# Allegro board PROJECT1.brd
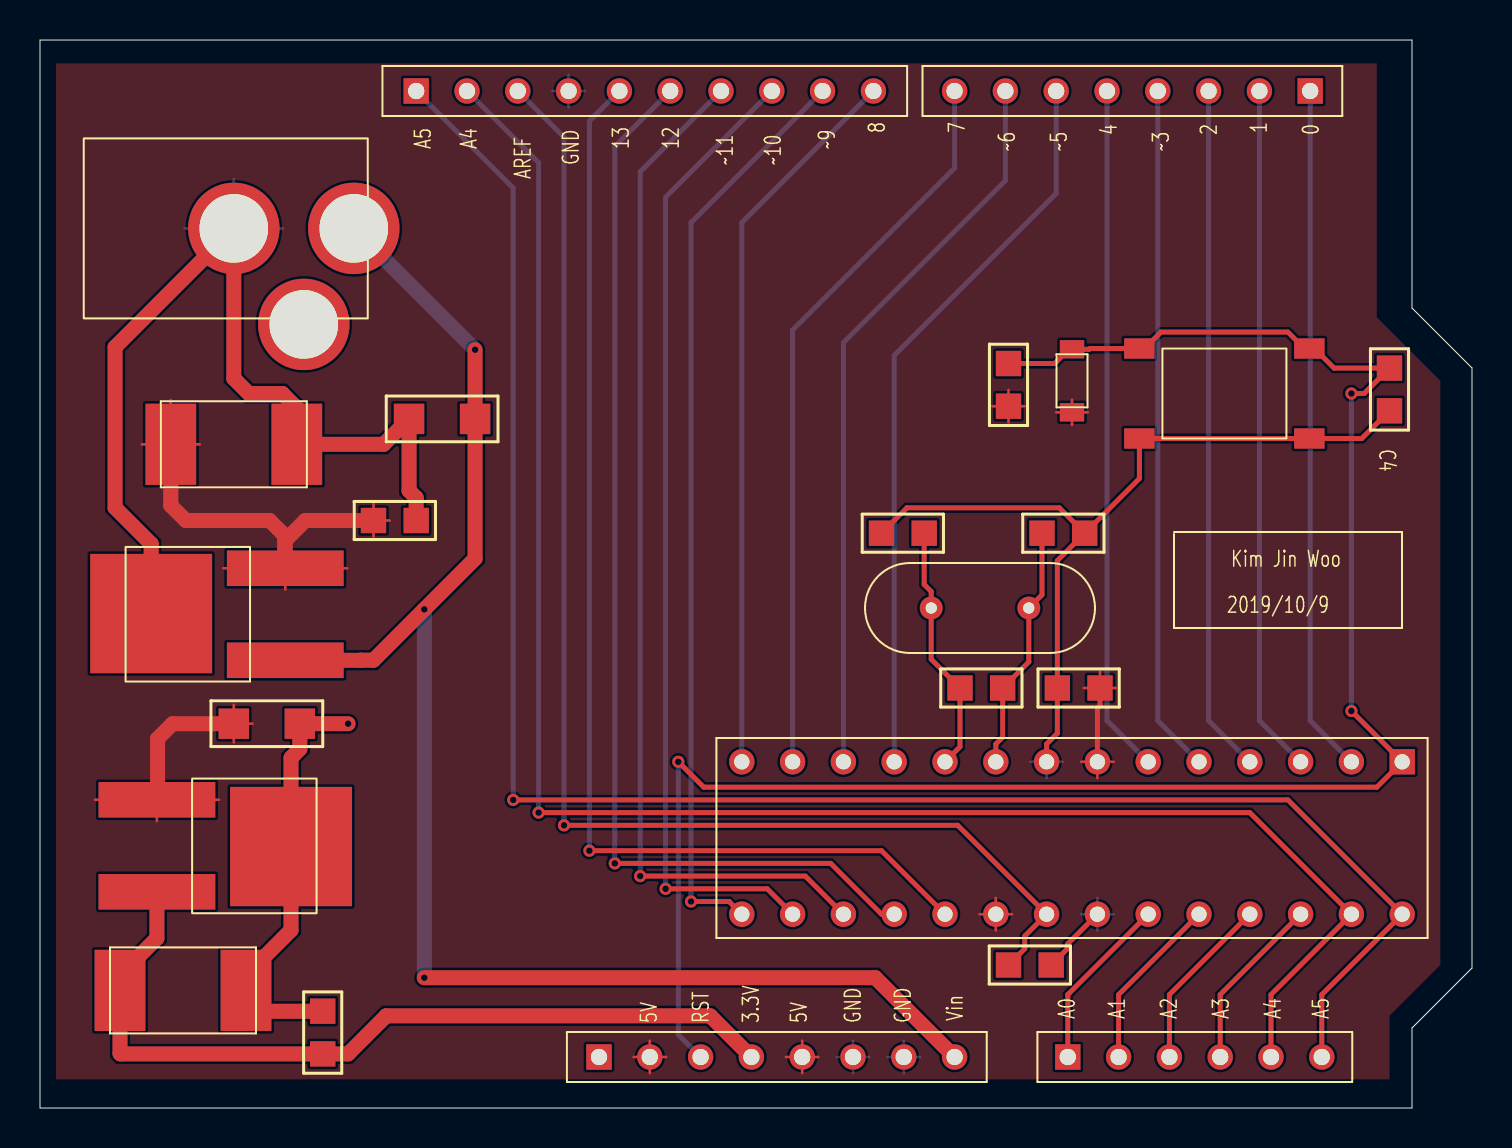
[diagram p0: board, top side]
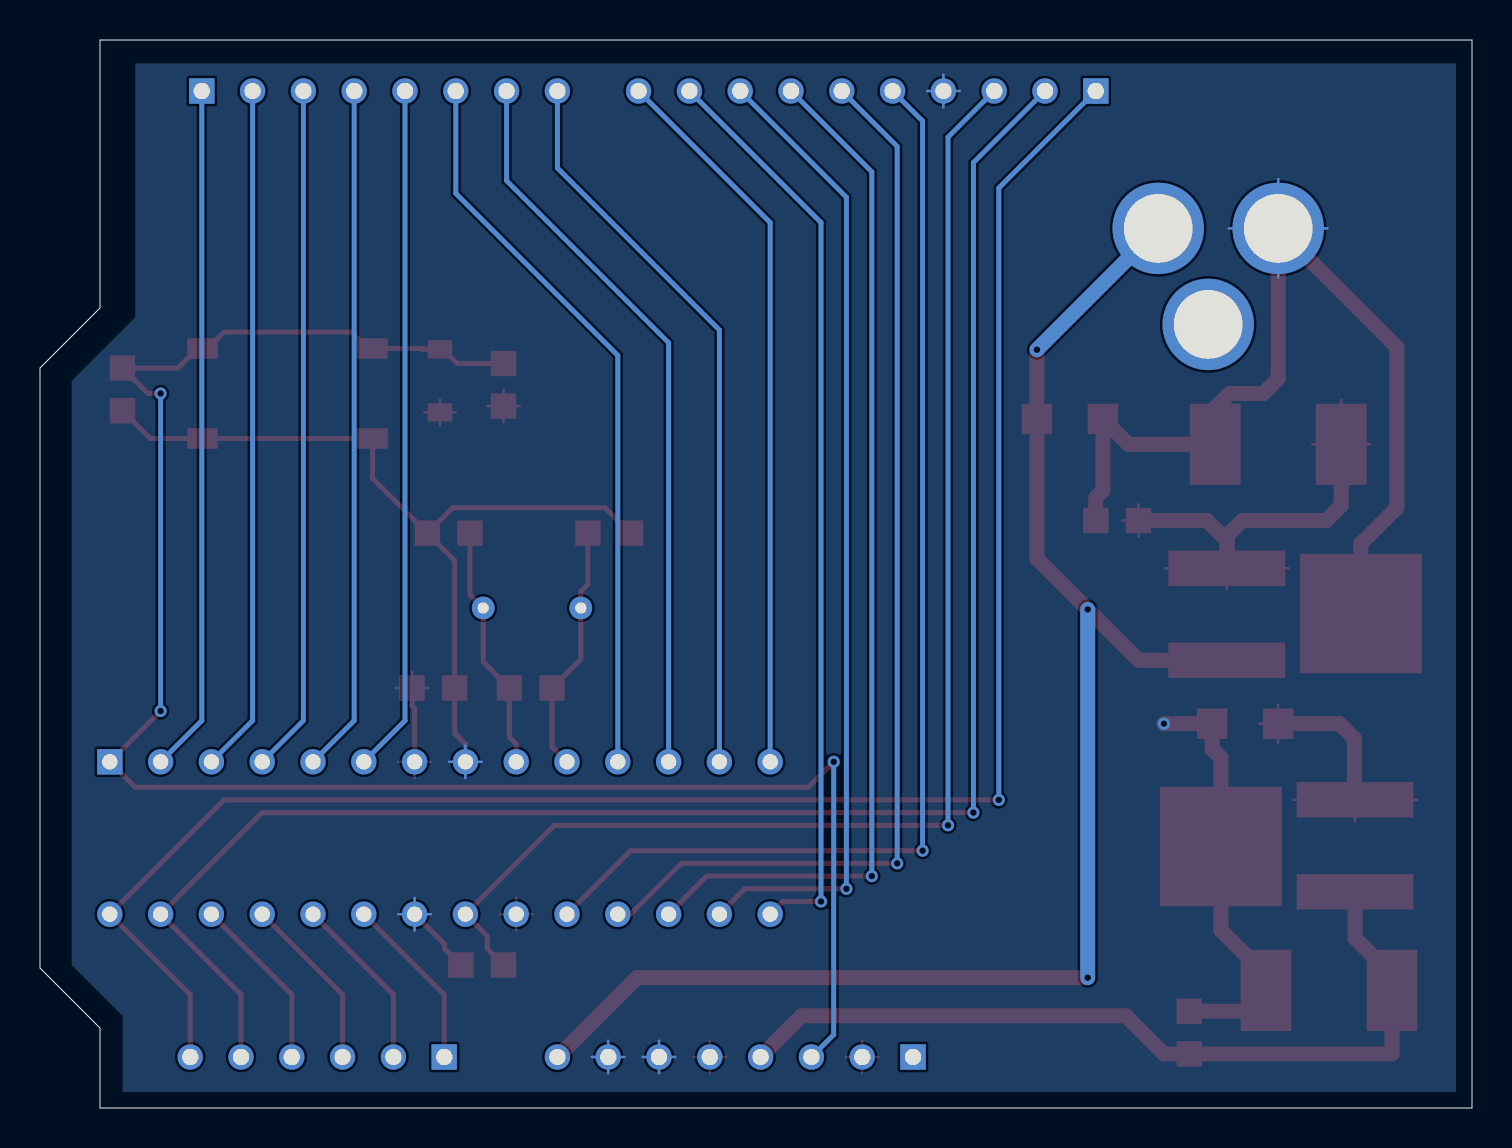
[diagram p1: board, bottom side, seen from below]

Outline 71.6 x 53.4 mm; copper layers: TOP, BOTTOM. Coordinates in mm from the lower left corner of the outline.
Outline path: 0,53.4 68.6,53.4 68.6,40 71.6,37 71.6,7 68.6,4 68.6,0 0,0 0,53.4

## Design rules (mm)
constraint set DEFAULT: min track width 0.127

## Placement (name value [footprint] x y rotation side)
C1  0.1u  [SMC0805]  16.67 29.38 0 top
C2  10u  [SMC1206]  21.75 34.45 180 top
C3  100u  [SMC2917]  9.69 33.19 0 top
C4  0.1u  [SMC0805]  67.47 37 270 top
C5  10u  [SMC1206]  9.69 19.22 0 top
C6  100u  [SMC2917]  7.15 5.88 0 top
C7  0.1u  [SMC0805]  14.14 2.7 90 top
C8  20p  [SMC0805]  42.08 28.74 0 top
C9  20p  [SMC0805]  52.23 28.74 180 top
C10  0.1u  [SMC0805]  53 21 180 top
C11  0.1u  [SMC0805]  48.42 7.15 0 top
D1  MMSD4148  [SOD-123]  51.6 36.36 90 top
J1  CONN JACK PWR  [BARREL_TYPE_E]  9.69 43.98 0 top
J2  CONN SOCKET 8  [HEADER8_2P54MM]  27.95 2.55 90 top
J3  CONN SOCKET 10  [HEADER10_2P54MM]  18.81 50.85 90 top
J4  CONN SOCKET 6  [HEADER6_2P54MM]  51.39 2.55 90 top
J5  CONN SOCKET 8  [HEADER8_2P54MM]  63.51 50.85 270 top
R1  10k  [SMC0805]  48.42 35.09 90 top
R2  1M  [SMC0805]  46 21 0 top
SW1  RESET SW  [TS-1105SMD]  59.22 35.72 0 top
U1  FR7805  [TO252AA]  12.23 22.39 90 top
U2  LF33  [TO252AA]  5.88 15.41 270 top
U3  ATmega328P  [PDIP28]  51.6 13.5 270 top
Y1  16MHz  [ATS-49SMD]  47 25 180 top

## Library data of the parts
C1 C4 C7-C11 = CAP NP
C2 C3 C5 C6 = CAP POL
D1 = DIODE
J1 = CONN JACK PWR
J2 J5 = CONN SOCKET 8
J3 = CONN SOCKET 10
J4 = CONN SOCKET 6
R1 R2 = RESISTOR
SW1 = SW_TC_SPST
U1 = FR7805
U2 = LF33
U3 = ATmega328P
Y1 = CRYSTAL

## Footprints (pads in the part's own frame, mm; a bottom-side part is the same pattern mirrored in y, then rotated)
ATS-49SMD
  round 1.143 hole 0.559: 1(-2.44,0) 2(2.44,0)
BARREL_TYPE_E
  round 4.572 hole 3.429: 1(6,0) 2(3.5,-4.8) 3(0,0)
HEADER6_2P54MM
  rect 1.27x1.27 hole 0.813: 1(0,0)
  round 1.27 hole 0.813: 2(0,-2.54) 3(0,-5.08) 4(0,-7.62) 5(0,-10.16) 6(0,-12.7)
HEADER8_2P54MM
  rect 1.27x1.27 hole 0.813: 1(0,0)
  round 1.27 hole 0.813: 2(0,-2.54) 3(0,-5.08) 4(0,-7.62) 5(0,-10.16) 6(0,-12.7) 7(0,-15.24) 8(0,-17.78)
HEADER10_2P54MM
  rect 1.27x1.27 hole 0.813: 1(0,0)
  round 1.27 hole 0.813: 2(0,-2.54) 3(0,-5.08) 4(0,-7.62) 5(0,-10.16) 6(0,-12.7) 7(0,-15.24) 8(0,-17.78) 9(0,-20.32) 10(0,-22.86)
PDIP28
  rect 1.27x1.27 hole 0.762: 1(-3.81,16.51)
  round 1.27 hole 0.762: 2(-3.81,13.97) 3(-3.81,11.43) 4(-3.81,8.89) 5(-3.81,6.35) 6(-3.81,3.81) 7(-3.81,1.27) 8(-3.81,-1.27) 9(-3.81,-3.81) 10(-3.81,-6.35) 11(-3.81,-8.89) 12(-3.81,-11.43) 13(-3.81,-13.97) 14(-3.81,-16.51) 15(3.81,-16.51) 16(3.81,-13.97) 17(3.81,-11.43) 18(3.81,-8.89) 19(3.81,-6.35) 20(3.81,-3.81) 21(3.81,-1.27) 22(3.81,1.27) 23(3.81,3.81) 24(3.81,6.35) 25(3.81,8.89) 26(3.81,11.43) 27(3.81,13.97) 28(3.81,16.51)
SMC0805
  rect 1.27x1.27 smd: 1(0,0) 2(2.134,0)
SMC1206
  rect 1.524x1.524 smd: 1(0,0) 2(3.302,0)
SMC2917
  rect 2.54x4.064 smd: 1(-3.15,0) 2(3.15,0)
SOD-123
  rect 0.914x1.219 smd: 1(-1.575,0) 2(1.575,0)
TO252AA
  rect 1.778x5.842 smd: 1(-0.004,-0.034) 3(4.596,-0.034)
  rect 5.969x6.096 smd: 2(2.332,6.673)
TS-1105SMD
  rect 1.524x1.016 smd: 1(-4.25,2.25) 2(4.25,2.25) 3(-4.25,-2.25) 4(4.25,-2.25)

## Nets
3.3V: C6.1 C7.1 J2.4 U2.3(OUT)
5V: C1.1 C3.1 C5.1 C10.1 D1.1(K) J2.2 J2.5 R1.1 U1.3(OUT) U2.1 U3.7 U3.20
GND_POWER: C1.2 C2.2 C3.2 C4.2 C5.2 C6.2 C7.2 C8.1 C9.1 C10.2 C11.2 J1.3 J2.6 J2.7 J3.4 SW1.3 SW1.4 U1.2 U2.2 U3.8 U3.22
VIN: C2.1 J1.1 J2.8 U1.1
AD0: J4.1 U3.23
AD1: J4.2 U3.24
AD2: J4.3 U3.25
AD3: J4.4 U3.26
AD4: J3.2 J4.5 U3.27
AD5: J3.1 J4.6 U3.28
AREF: C11.1 J3.3 U3.21
IO0: J5.1 U3.2
IO1: J5.2 U3.3
IO2: J5.3 U3.4
IO3: J5.4 U3.5
IO4: J5.5 U3.6
IO5: J5.6 U3.11
IO6: J5.7 U3.12
IO7: J5.8 U3.13
IO8: J3.10 U3.14
IO9: J3.9 U3.15
IO10: J3.8 U3.16
IO11: J3.7 U3.17
IO12: J3.6 U3.18
IO13: J3.5 U3.19
NRESET: C4.1 D1.2 J2.3 R1.2 SW1.1 SW1.2 U3.1
N02893: C8.2 R2.1 U3.10(XTAL2) Y1.2
N02902: C9.2 R2.2 U3.9 Y1.1

Pads without a net: J1 2; J2 1

## Via types
v1: diameter 0.61, hole 0.33, TOP to BOTTOM, 15 vias

## Routing (per net, layer and track width the routed paths; a pad name or vN(x,y) marks a point on that pad's centre or on a via; arc(x,y) is an arc through that point)
3.3V: length 42.1
  TOP w0.75: U2.3 5.85,8.49 4,6.64 C6.1 4,2.73 4.02,2.7 C7.1 15.41,2.7 17.31,4.61 33.51,4.61 J2.4
5V: length 73.2
  TOP w0.127: 5.85,14.34 U2.1 ; U2.1 2.75,15.41 ; U2.1 8.95,15.41 ; C10.1 53.81,21 ; C10.1 53,21.81 ; C10.1 52.19,21 ; C1.1 16.67,30.19 ; C1.1 16.67,28.56 ; C1.1 17.49,29.38 ; C5.1 10.63,19.22 ; C5.1 9.69,20.16 ; C5.1 9.69,18.28 ; 5.09,33.19 C3.1 ; C3.1 7.99,33.19 ; C3.1 6.54,35.39 ; 29.68,2.55 J2.2 ; J2.2 30.49,3.36 ; J2.2 30.49,1.74 ; J2.2 31.3,2.55 ; 47.61,35.09 R1.1 ; R1.1 49.24,35.09 ; R1.1 48.42,35.9 ; R1.1 48.42,34.28 ; 52.06,17.31 U3.7 ; U3.7 52.87,16.5 ; U3.7 53.68,17.31 ; J2.5 38.92,2.55 ; J2.5 38.11,1.74 ; J2.5 38.11,3.36 ; J2.5 37.3,2.55 ; U3.20 47.79,10.5 ; U3.20 46.98,9.69 ; U3.20 47.79,8.88 ; U3.20 48.6,9.69 ; 9.16,26.99 U1.3 ; U1.3 12.26,25.92 ; U1.3 15.36,26.99 ; D1.1 51.6,35.42 ; D1.1 51.6,34.15 ; D1.1 50.81,34.78 ; D1.1 52.39,34.78
  TOP w0.25: C10.1 53,20.11 52.87,19.98 U3.7
  TOP w0.75: 5.85,16.04 5.88,16.08 5.88,18.47 6.63,19.22 C5.1 ; C1.1 13.26,29.38 12.26,28.38 U1.3 12.23,27.02 12.23,28.62 11.48,29.38 7.29,29.38 6.54,30.12 C3.1
GND_POWER: length 140.5
  TOP w0.25: C9.1 50.87,27.37 C10.2 50.87,18.73 50.33,18.2 U3.8 ; C9.1 54.97,31.48 SW1.3 ; C9.1 50.97,30.01 43.34,30.01 C8.1 ; SW1.3 SW1.4 66.09,33.48 C4.2 ; SW1.3 54.72,33.48 ; U3.22 51.37,8.19 51.37,7.96 C11.2
  TOP w0.75: C7.2 11.34,4.84 C6.2 10.3,6.64 12.55,8.89 U2.2 12.55,17.51 12.99,17.95 C5.2 v1(15.41,19.22) ; 5.56,24.57 U1.2 5.56,28.21 3.76,30.01 3.76,38.05 J1.3 9.69,36.47 10.44,35.72 12.12,35.72 12.87,34.97 12.87,33.21 C3.2 17.18,33.19 C2.2 18.45,30.87 18.81,30.51 C1.2
  BOTTOM w0.127: 50.33,16.5 U3.8 ; U3.8 49.52,17.31 ; U3.8 50.33,18.12 ; U3.8 51.14,17.31 ; J2.7 44,2.55 ; J2.7 43.19,3.36 ; J2.7 43.19,1.74 ; J2.7 42.38,2.55 ; 52.06,9.69 U3.22 ; U3.22 52.87,10.5 ; U3.22 53.68,9.69 ; U3.22 52.87,8.88 ; J1.3 9.69,46.44 ; J1.3 9.69,41.52 ; J1.3 12.15,43.98 ; J1.3 7.23,43.98 ; 40.65,1.74 J2.6 ; J2.6 41.46,2.55 ; J2.6 39.84,2.55 ; J2.6 40.65,3.36 ; J3.4 27.24,50.85 ; J3.4 26.43,51.66 ; J3.4 26.43,50.04 ; J3.4 25.62,50.85
VIN: length 77.2
  TOP w0.75: J2.8 41.77,6.52 v1(19.22,6.52) ; U1.1 16.04,22.39 16.04,22.39 16.67,22.39 v1(19.22,24.93) 21.75,27.47 C2.1 v1(21.75,37.92)
  BOTTOM w0.75: J1.1 v1(21.75,37.92) ; v1(19.22,6.52) v1(19.22,24.93)
AD0: length 8.8
  TOP w0.25: U3.23 51.39,5.67 J4.1
AD1: length 8.8
  TOP w0.25: J4.2 53.93,5.67 U3.24
AD2: length 8.8
  TOP w0.25: U3.25 56.47,5.67 J4.3
AD3: length 8.8
  TOP w0.25: U3.26 59.01,5.67 J4.4
AD4: length 89.1
  TOP w0.25: J4.5 61.55,5.67 U3.27 60.49,14.77 v1(24.93,14.77)
  BOTTOM w0.25: v1(24.93,14.77) 24.93,47.27 J3.2
AD5: length 93.1
  TOP w0.25: J4.6 64.09,5.67 U3.28 62.39,15.41 v1(23.66,15.41)
  BOTTOM w0.25: v1(23.66,15.41) 23.66,46 J3.1
AREF: length 67
  TOP w0.25: v1(26.2,14.14) 45.89,14.14 U3.21 49.24,8.6 49.24,7.96 C11.1
  BOTTOM w0.25: J3.3 26.2,48.54 v1(26.2,14.14)
IO0: length 34.4
  BOTTOM w0.25: J5.1 63.51,19.37 U3.2
IO1: length 34.4
  BOTTOM w0.25: U3.3 60.97,19.37 J5.2
IO2: length 34.4
  BOTTOM w0.25: J5.3 58.43,19.37 U3.4
IO3: length 34.4
  BOTTOM w0.25: U3.5 55.89,19.37 J5.4
IO4: length 34.4
  BOTTOM w0.25: J5.5 53.35,19.37 U3.6
IO5: length 36.9
  BOTTOM w0.25: U3.11 42.71,37.63 50.81,45.73 J5.6
IO6: length 36.9
  BOTTOM w0.25: U3.12 40.17,38.27 48.27,46.36 J5.7
IO7: length 36.9
  BOTTOM w0.25: U3.13 37.63,38.9 45.73,47 J5.8
IO8: length 36.5
  TOP w0.25: J3.10 41.42,50.85
  BOTTOM w0.25: J3.10 35.09,44.27 U3.14
IO9: length 46.1
  TOP w0.25: v1(32.55,10.33) 34.45,10.33 U3.15
  BOTTOM w0.25: J3.9 32.55,44.27 v1(32.55,10.33)
IO10: length 49
  TOP w0.25: v1(31.28,10.96) 36.36,10.96 U3.16
  BOTTOM w0.25: v1(31.28,10.96) 31.28,45.54 J3.8
IO11: length 51.9
  TOP w0.25: v1(30.01,11.59) 38.27,11.59 U3.17
  BOTTOM w0.25: v1(30.01,11.59) 30.01,46.81 J3.7
IO12: length 54.8
  TOP w0.25: v1(28.74,12.23) 39.53,12.23 42.08,9.69 U3.18
  BOTTOM w0.25: v1(28.74,12.23) 28.74,48.08 J3.6
IO13: length 57.7
  TOP w0.25: v1(27.47,12.87) 42.08,12.87 U3.19
  BOTTOM w0.25: v1(27.47,12.87) 27.47,49.35 J3.5
NRESET: length 94.8
  TOP w0.25: R1.2 50.74,37.22 51.45,37.94 D1.2 52.46,37.94 52.5,37.97 SW1.1 55.22,37.97 56.05,38.8 62.39,38.8 63.22,37.97 SW1.2 63.72,37.97 64.7,37 C4.1 66.2,35.72 v1(65.57,35.72) ; v1(31.92,17.31) 33.19,16.04 66.84,16.04 U3.1 v1(65.57,19.85)
  BOTTOM w0.25: J2.3 31.92,3.66 v1(31.92,17.31) ; v1(65.57,19.85) v1(65.57,35.72)
N02893: length 12.5
  TOP w0.25: C8.2 44.21,26.18 44.56,25.82 Y1.2 44.56,22.44 R2.1 46,18.06 U3.10
N02902: length 12.4
  TOP w0.25: C9.2 50.1,25.66 Y1.1 49.44,22.31 R2.2 48.13,18.54 47.79,18.2 U3.9

## Copper pours and planes (outline as drawn; the poured copper is in the pictures)
5V on TOP: 0.8,52.23 66.84,52.23 66.84,39.53 70.02,36.36 70.02,7.15 67.47,4.61 67.47,1.44 0.8,1.44
GND_POWER on BOTTOM: 0.8,52.23 0.8,0.8 67.47,0.8 67.47,4.61 70.02,7.15 70.02,36.36 66.84,39.53 66.84,52.23 ; 2 cut-outs

## Text on the board
Ref Des/Silkscreen Top: 2019/10/9 | Kim Jin Woo | A5 | A4 | AREF | GND | 13 | 5V | 12 | RST | ~11 | 3.3V | ~10 | ~9 | 8 | Vin | 7 | ~6 | ~5 | A0 | 4 | A1 | ~3 | A2 | 2 | A3 | 1 | 0
NCLEGEND-1-2: FIGURE | FINISHED_SIZE | 0.3302 | 0.5588 | 0.762 | 0.8128 | 3.429 | DRILL CHART: TOP to BOTTOM | ALL UNITS ARE IN MILLIMETERS | PLATED | QTY | 19 | 2 | 28 | 32 | 3
